# EAGLE board controller 2 (EAGLE 6.2)
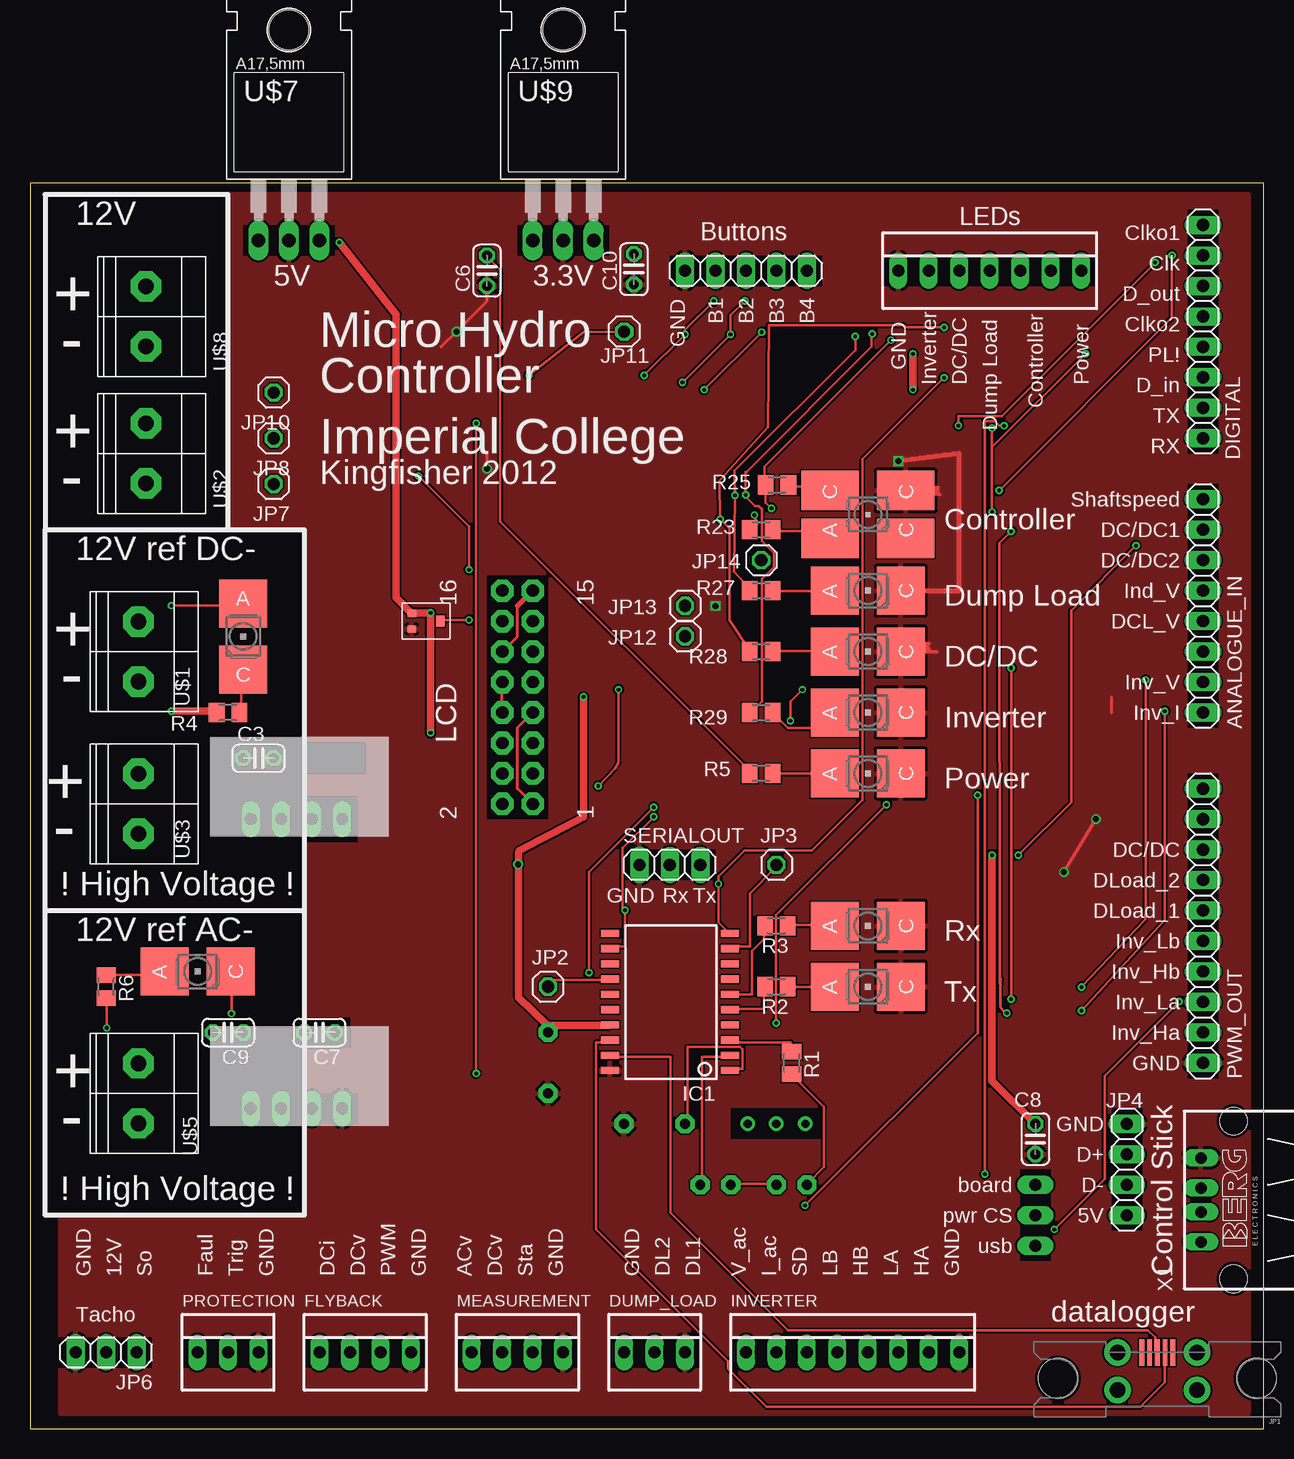
[diagram p0: board, top side]
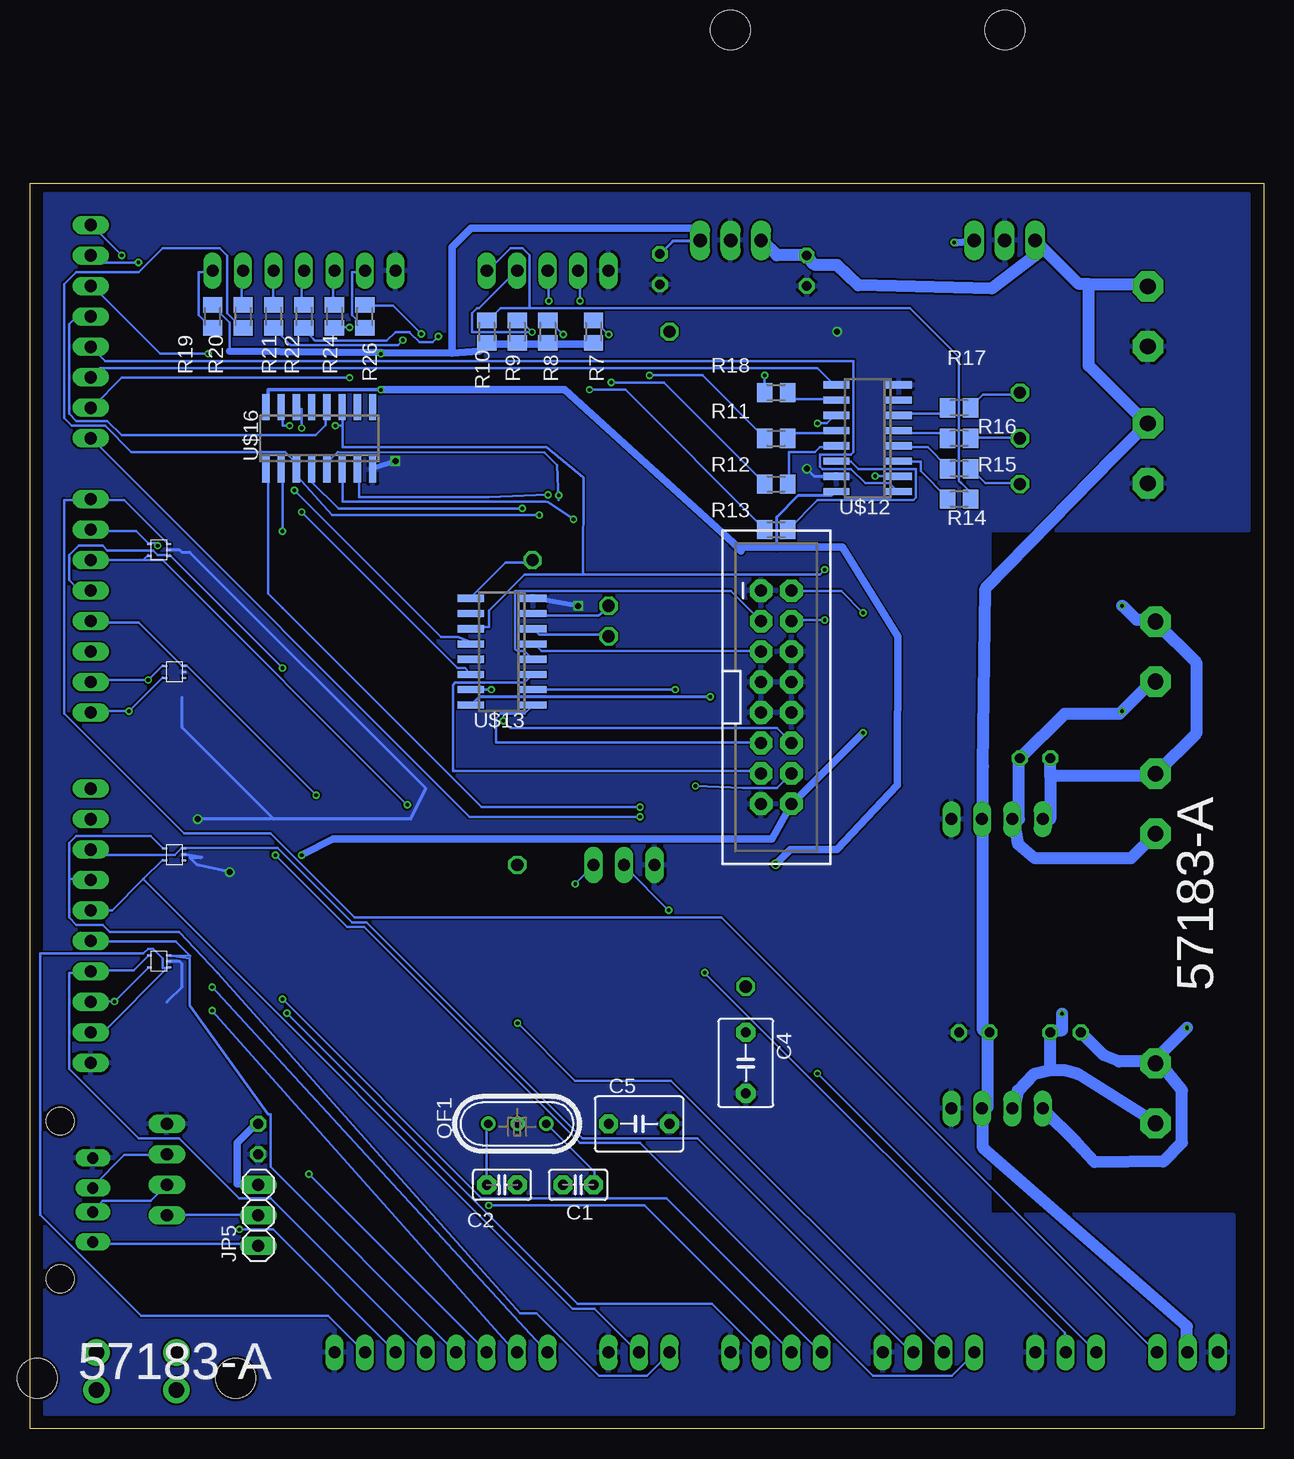
[diagram p1: board, bottom side, seen from below]

Size 102.85 x 103.81 mm. Coordinates in mm from the lower left corner, seen from the top.
Outline: 0,0 102.85,0 102.85,103.81 0,103.81 0,0
Copper layers (1*16): Top 0.035mm / dielectric 1.5mm / Bottom 0.035mm
Design rules: minimum track width 8mil, minimum drill 12mil, track to track 6mil, track to pad 6mil, pad to pad 6mil, via to via 6mil, smd to smd 0mil, copper to edge 10mil, drill to drill 10mil, minimum pad ring 10mil, minimum via ring 6mil, stop-mask expansion 2mil, vias tented up to drill 100mil, thermal gap 10mil
Net classes: 1 Power: width 0.635 mm
tRestrict: area 96.5,81.3 to 99.1,101.6; area 96.5,81.3 to 99.1,101.6; area 96.5,58.4 to 99.1,78.7; area 96.5,29.2 to 99.1,54.6; area 90.2,16.5 to 92.7,26.7; area 82.5,14 to 85.1,21.6; area 58.4,24.1 to 66,26.7; area 58.4,5.1 to 78.7,7.6; area 48.3,5.1 to 55.9,7.6; area 35.6,5.1 to 45.7,7.6; area 22.9,5.1 to 33,7.6; area 12.7,5.1 to 20.3,7.6; 18 more areas

## Footprints (pad centres in the part's own frame; a part is rotated, then mirrored left to right if it is on the bottom)
1X08 = drill 1.016 long: 1 -8.89,0; 2 -6.35,0; 3 -3.81,0; 4 -1.27,0; 5 1.27,0; 6 3.81,0; 7 6.35,0; 8 8.89,0
C2.5-2 = drill 0.813 pad 1.6 octagon: 1 -1.27,0; 2 1.27,0
C025-024X044 = drill 0.813 octagon: 1 -1.27,0; 2 1.27,0
C5B4.5 = drill 0.813 pad 1.6 octagon: 1 -2.54,0; 2 2.54,0
P-LCC-4 = smd 3.3 x 4.8: A -2,3.15; C@1 -2,-3.15; C@3 2,3.15; C@4 2,-3.15
P-LCC-2 = smd 4 x 4: A 0,2.75; C 0,-2.75
22-23-2031 = drill 1 long: 1 -2.54,0; 2 0,0; 3 2.54,0
22-23-2041 = drill 1 long: 1 -3.81,0; 2 -1.27,0; 3 1.27,0; 4 3.81,0
SOIC20 = smd 0.6 x 1.5: 1 -5.715,-5; 2 -4.445,-5; 3 -3.175,-5; 4 -1.905,-5; 5 -0.635,-5; 6 0.635,-5; 7 1.905,-5; 8 3.175,-5; 9 4.445,-5; 10 5.715,-5; 11 5.715,5; 12 4.445,5; 13 3.175,5; 14 1.905,5; 15 0.635,5; 16 -0.635,5; 17 -1.905,5; 18 -3.175,5; 19 -4.445,5; 20 -5.715,5
22-23-2081 = drill 1 long: 1 -8.89,0; 2 -6.35,0; 3 -3.81,0; 4 -1.27,0; 5 1.27,0; 6 3.81,0; 7 6.35,0; 8 8.89,0
MICRO-B-SMT = smd 0.4 x 2.2: 1 -1.3,0; 2 -0.65,0; 3 0,0; 4 0.65,0; 5 1.3,0 | drill 1.3 pad 2.2: P$6 -3.325,3.15; P$7 -3.325,0; P$8 3.325,3.15; P$9 3.325,0 | hole 3.3: -8.275,2.17; 8.275,2.17
1X01 = drill 1.016 octagon: 1 0,0
1X04 = drill 1.016 long: 1 -3.81,0; 2 -1.27,0; 3 1.27,0; 4 3.81,0
1X03 = drill 1.016 long: 1 -2.54,0; 2 0,0; 3 2.54,0
1X05 = drill 1.016 long: 1 -5.08,0; 2 -2.54,0; 3 0,0; 4 2.54,0; 5 5.08,0
2X8-SHROUDED_LOCK = drill 1.016 pad 1.88 octagon: 1 -1.27,8.89; 2 1.27,8.89; 3 -1.27,6.35; 4 1.27,6.35; 5 -1.27,3.81; 6 1.27,3.81; 7 -1.27,1.27; 8 1.27,1.27; 9 -1.27,-1.27; 10 1.27,-1.27; 11 -1.27,-3.81; 12 1.27,-3.81; 13 -1.27,-6.35; 14 1.27,-6.35; 15 -1.27,-8.89; 16 1.27,-8.89
1X10 = drill 1.016 long: 1 -11.43,0; 2 -8.89,0; 3 -6.35,0; 4 -3.81,0; 5 -1.27,0; 6 1.27,0; 7 3.81,0; 8 6.35,0; 9 8.89,0; 10 11.43,0
HC49U = drill 0.7 pad 1.2: 1 -2.413,0; 2 -0.027,0; 3 2.413,0
M0805 = smd 1.3 x 1.6: 1 -0.95,0; 2 0.95,0
CTB1500-2 = drill 1.3 pad 2.54 octagon: P$1 -2.5,0.5; P$2 2.5,0.5
KFP_DC-DC = drill 1 pad 1.016 long: +VIN 2.54,0; +VOUT 7.62,0; -VIN 0,0; -VOUT 5.08,0
TO220 = drill 1.118 long: 1 -2.54,-6.35; 2 0,-6.35; 3 2.54,-6.35 | hole 3.302: 0,11.176
EVS_NXP = smd 0.17 x 0.4: P$1 0.35,-0.15; P$2 0.85,-0.15; P$3 1.35,-0.15; P$4 1.35,1.45; P$5 0.35,1.45
SO16 = smd 0.6 x 2.2: 1 -4.445,-2.6; 2 -3.175,-2.6; 3 -1.905,-2.6; 4 -0.635,-2.6; 5 0.635,-2.6; 6 1.905,-2.6; 7 3.175,-2.6; 8 4.445,-2.6; 9 4.445,2.6; 10 3.175,2.6; 11 1.905,2.6; 12 0.635,2.6; 13 -0.635,2.6; 14 -1.905,2.6; 15 -3.175,2.6; 16 -4.445,2.6
MURATA_PVZ2A = smd 0.6 x 0.7: 1 -0.65,-1.2; 3 0.65,-1.2 | smd 0.9 x 0.7: 2 0,1.2
PN87520 = drill 0.95 long: 1 -3.5,2.71; 2 -1,2.71; 3 1,2.71; 4 3.5,2.71 | hole 2.3: -6.57,0; 6.57,0
22-23-2071 = drill 1 long: 1 -7.62,0; 2 -5.08,0; 3 -2.54,0; 4 0,0; 5 2.54,0; 6 5.08,0; 7 7.62,0

## Placement (x,y rotation side)
ANALOGUE_IN  [1X08]  97.79,68.58 90 top
C1  39p  [C2.5-2]  57.15,20.32 0 bottom
C2  39p  [C2.5-2]  63.5,20.32 180 bottom
C3  10u  [C025-024X044]  19.05,55.88 0 top
C4  0.1u  [C5B4.5]  43.18,30.48 270 bottom
C5  0.1u  [C5B4.5]  52.07,25.4 0 bottom
C6  20u  [C025-024X044]  38.1,96.52 90 top
C7  0.33u  [C025-024X044]  24.13,33.02 180 top
C8  0.1u  [C025-024X044]  83.82,24.13 270 top
C9  10u  [C025-024X044]  16.51,33.02 180 top
C10  0.1u  [C025-024X044]  50.34,96.65 90 top
CONTR_GREEN  [P-LCC-4]  69.85,76.2 90 top
DC/DC  [P-LCC-2]  69.85,64.77 90 top
DC/DC_ON1  [P-LCC-2]  17.78,66.04 0 top
DC/DC_ON2  [P-LCC-2]  69.85,36.83 90 top
DC/DC_ON3  [P-LCC-2]  69.85,41.91 90 top
DC/DC_ON4  [P-LCC-2]  13.97,38.1 90 top
DIGITAL  [1X08]  97.79,91.44 270 top
DUMP_LOAD  22-23-2031  [22-23-2031]  52.07,6.35 0 top
DUMP_LOAD_  [P-LCC-2]  69.85,69.85 90 top
FLYBACK  22-23-2041  [22-23-2041]  27.94,6.35 0 top
IC1  MCP2200SOIC20  [SOIC20]  53.34,35.56 90 top
INVERTER  22-23-2081  [22-23-2081]  68.58,6.35 0 top
INVERTER_  [P-LCC-2]  69.85,59.69 90 top
JP1  USB_MICROB_PLUG-SMT  [MICRO-B-SMT]  93.98,6.35 180 top
JP2  [1X01]  43.18,36.83 0 top
JP3  [1X01]  62.23,46.99 0 top
JP4  [1X04]  91.44,21.59 90 top
JP5  [1X03]  83.82,17.78 90 bottom
JP6  [1X03]  6.35,6.35 180 top
JP7  [1X01]  20.32,78.74 180 top
JP8  [1X01]  20.32,82.55 180 top
JP9  [1X05]  59.69,96.52 180 top
JP10  [1X01]  20.32,86.36 180 top
JP11  [1X01]  49.53,91.44 270 top
JP12  [1X01]  54.61,66.04 0 top
JP13  [1X01]  54.61,68.58 0 top
JP14  [1X01]  60.96,72.39 0 top
LCD_SCREEN  M08X2-SHROUDED_LOCK  [2X8-SHROUDED_LOCK]  40.64,60.96 0 bottom
LED1  [P-LCC-2]  69.85,54.61 90 top
MEASUREMENT  22-23-2041  [22-23-2041]  40.64,6.35 0 top
PROTECTION  22-23-2031  [22-23-2031]  16.51,6.35 0 top
PWM_OUT  [1X10]  97.79,41.91 90 top
QF1  10M7AHC49T  [HC49U]  62.23,25.4 180 bottom
R1  0  [M0805]  63.5,30.48 270 top
R2  200  [M0805]  62.23,36.83 180 top
R3  200  [M0805]  62.23,41.91 180 top
R4  1.2k  [M0805]  16.51,59.69 0 top
R5  1.2k  [M0805]  60.96,54.61 0 top
R6  1.2k  [M0805]  6.35,36.83 270 top
R7  100k  [M0805]  55.88,91.44 90 bottom
R8  100k  [M0805]  59.69,91.44 90 bottom
R9  100k  [M0805]  62.23,91.44 90 bottom
R10  100k  [M0805]  64.77,91.44 90 bottom
R11  20  [M0805]  40.64,82.55 180 bottom
R12  20  [M0805]  40.64,78.74 180 bottom
R13  20  [M0805]  40.64,74.93 180 bottom
R14  20  [M0805]  25.4,77.47 0 bottom
R15  20  [M0805]  25.4,80.01 0 bottom
R16  20  [M0805]  25.4,82.55 0 bottom
R17  20  [M0805]  25.4,85.09 0 bottom
R18  20  [M0805]  40.64,86.36 180 bottom
R19  200  [M0805]  87.63,92.71 270 bottom
R20  200  [M0805]  85.09,92.71 90 bottom
R21  200  [M0805]  82.55,92.71 90 bottom
R22  200  [M0805]  80.01,92.71 90 bottom
R23  200  [M0805]  60.96,74.93 180 top
R24  200  [M0805]  77.47,92.71 90 bottom
R25  200  [M0805]  62.28,78.66 180 top
R26  200  [M0805]  74.93,92.71 270 bottom
R27  200  [M0805]  60.96,69.85 180 top
R28  200  [M0805]  60.96,64.77 180 top
R29  200  [M0805]  60.96,59.69 180 top
SERIALOUT  [1X03]  53.34,46.99 180 top
U$1  CTB1500/2  [CTB1500-2]  9.53,64.77 90 top
U$2  CTB1500/2  [CTB1500-2]  10.16,81.28 90 top
U$3  CTB1500/2  [CTB1500-2]  9.53,52.07 90 top
U$4  KFP_DC-DC12V  [KFP_DC-DC]  26.04,50.8 180 top
U$5  CTB1500/2  [CTB1500-2]  9.53,27.94 90 top
U$6  KFP_DC-DC12V  [KFP_DC-DC]  26.04,26.67 180 top
U$7  KFP_VOLTAGE_REGULATOR  [TO220]  21.59,105.41 0 top
U$8  CTB1500/2  [CTB1500-2]  10.16,92.71 90 top
U$9  KFP_VOLTAGE_REGULATOR  [TO220]  44.45,105.41 0 top
U$10  EVS_NXP  [EVS_NXP]  91.44,38.1 90 bottom
U$11  EVS_NXP  [EVS_NXP]  90.17,46.99 90 bottom
U$12  74HC165  [SO16]  33.02,82.55 90 bottom
U$13  SN74AHC594  [SO16]  63.5,64.77 90 bottom
U$14  EVS_NXP  [EVS_NXP]  90.17,62.23 90 bottom
U$15  EVS_NXP  [EVS_NXP]  91.44,72.39 90 bottom
U$16  SN74AHC594  [SO16]  78.74,82.55 0 bottom
U$17  10k  [MURATA_PVZ2A]  33.02,67.31 270 top
X1  [PN87520]  100.33,19.05 90 top
X2  22-23-2071  [22-23-2071]  80.01,96.52 0 top

## Library data of the parts
ANALOGUE_IN DIGITAL JP2-JP14 PWM_OUT SERIALOUT = pinhead
C1 C2 C4 C5 = capacitor-wima
C3 C6-C10 = rcl
CONTR_GREEN DC/DC DC/DC_ON1-DC/DC_ON4 DUMP_LOAD_ INVERTER_ LED1 = led
DUMP_LOAD PROTECTION = con-molex; MF: MOLEX; MPN: 22-23-2031; OC_FARNELL: 1462950; OC_NEWARK: 30C0862
FLYBACK MEASUREMENT = con-molex; MF: MOLEX; MPN: 22-23-2041; OC_FARNELL: 1462920; OC_NEWARK: 38C0355
IC1 = microchip-update-2
INVERTER = con-molex; MF: MOLEX; MPN: 22-23-2081; OC_FARNELL: 1756826; OC_NEWARK: 01C7592
JP1 LCD_SCREEN = SparkFun
QF1 = crystal; OC_FARNELL: unknown; OC_NEWARK: unknown
R1-R29 = resistor
U$1-U$3 U$5 U$8 U$17 = eko-parts
U$4 U$6 = dc-dc12V
U$7 U$9 = transistor-fet_edited
U$10-U$16 = lbr_controller
X1 = con-berg; OC_FARNELL: unknown; OC_NEWARK: unknown
X2 = con-molex; MF: MOLEX; MPN: 22-23-2071; OC_FARNELL: 1654534; OC_NEWARK: 56H0445

## Nets
3.3V: C4.1 C10.2 IC1.17 R7.1 R8.1 R9.1 R10.1 R19.1 U$9.3 U$12.16 U$13.16 U$16.16
5V: C8.1 JP5.3 LCD_SCREEN.2 LCD_SCREEN.16 U$7.3 U$17.1
12V: C6.2 C7.2 JP6.2 R5.1 U$2.P$2 U$4.+VIN U$6.+VIN U$7.1 U$8.P$2 U$9.1
CLOCK: DIGITAL.2 U$12.2 U$13.11 U$16.11
CTR_PICCOLO_POWER: JP4.1 JP5.2
D1: LCD_SCREEN.12 U$13.15
D2: LCD_SCREEN.11 U$13.1
D3: LCD_SCREEN.14 U$13.2
D4: LCD_SCREEN.13 U$13.3
DATA_IN: DIGITAL.6 U$12.9
DC/DC_IN_1: ANALOGUE_IN.6 FLYBACK.2 U$15.P$5
DC/DC_IN_2: ANALOGUE_IN.7 FLYBACK.1 U$15.P$4
DC/DC_ON: R26.1 R29.2 U$16.7
DUMP_LOAD1: DUMP_LOAD.2 PWM_OUT.6 U$11.P$5
DUMP_LOAD2: DUMP_LOAD.1 PWM_OUT.7 U$11.P$4
DUMP_LOAD_1_ON: R22.1 R27.2 U$16.5
E: LCD_SCREEN.5 U$13.5
FLYBACK: FLYBACK.3 PWM_OUT.8 U$11.P$3
GND: C4.2 C5.2 C6.1 C7.1 C8.2 C10.1 CONTR_GREEN.C@4 DC/DC.C DC/DC_ON2.C DC/DC_ON3.C DUMP_LOAD.3 DUMP_LOAD_.C FLYBACK.4 IC1.20 INVERTER.8 INVERTER_.C JP4.4 JP6.3 JP9.5 LCD_SCREEN.1 LCD_SCREEN.6 LCD_SCREEN.7 LCD_SCREEN.8 LCD_SCREEN.9 LCD_SCREEN.10 LCD_SCREEN.15 LED1.C MEASUREMENT.4 PROTECTION.3 PWM_OUT.1 SERIALOUT.3 U$2.P$1 U$4.-VIN U$6.-VIN U$7.2 U$8.P$1 U$9.2 U$10.P$2 U$11.P$2 U$12.8 U$12.15 U$13.8 U$14.P$2 U$15.P$2 U$16.8 U$17.3 X1.4 X2.1
GND#: JP1.5
INV_HA: INVERTER.7 PWM_OUT.2 U$10.P$1
INV_HB: INVERTER.5 PWM_OUT.4 U$10.P$4
INV_I: ANALOGUE_IN.1 INVERTER.2 U$14.P$5
INV_LA: INVERTER.6 PWM_OUT.3 U$10.P$5
INV_LB: INVERTER.4 PWM_OUT.5 U$10.P$3
INV_V: ANALOGUE_IN.2 INVERTER.1 U$14.P$4
INVERTER_ON: R24.1 R28.2 U$16.6
LOAD: DIGITAL.5 U$12.1
MEAS_AC: ANALOGUE_IN.5 MEASUREMENT.1 U$15.P$1
MEAS_DC: ANALOGUE_IN.4 MEASUREMENT.2 U$14.P$3
N$1: R12.1 U$12.13
N$2: LED1.A R5.2
N$4: R19.2 X2.7
N$5: R16.1 U$12.5
N$7: DC/DC_ON1.C R4.2
N$8: R17.1 U$12.6
N$9: JP12.1 U$13.6
N$10: IC1.3 R1.1
N$11: DIGITAL.1 U$13.12
N$12: JP13.1 U$13.7
N$13: R20.1 R23.2 U$16.3
N$14: C2.2 QF1.3 R1.2
N$15: ANALOGUE_IN.3
N$18: U$11.P$1
N$19: DC/DC_ON4.A R6.1
N$20: JP14.1 U$13.9
N$21: U$14.P$1
N$23: R21.1 R25.2 U$16.4
N$24: DIGITAL.3 U$13.14 U$16.14
N$30: JP9.1 R10.2 R14.2
N$34: JP9.2 R9.2 R13.2
N$35: C3.1 DC/DC_ON1.A U$1.P$2 U$3.P$2 U$4.+VOUT
N$36: C1.1 C2.1
N$37: C1.2 IC1.2 QF1.1
N$38 [Power]: C3.2 R4.1 U$1.P$1 U$3.P$1 U$4.-VOUT
N$39: R20.2 X2.6
N$40: R21.2 X2.5
N$42: R22.2 X2.4
N$44: JP9.3 R8.2 R12.2
N$45: C9.2 R6.2 U$5.P$2 U$6.+VOUT
N$47: U$16.9
N$48: C9.1 DC/DC_ON4.C U$5.P$1 U$6.-VOUT
N$49: DIGITAL.4 U$16.12
N$51: DUMP_LOAD_.A R27.1
N$52: DC/DC.A R28.1
N$53: INVERTER_.A R29.1
N$54: CONTR_GREEN.A R23.1
N$55: JP9.4 R7.2 R11.2
N$56: R24.2 X2.3
N$57: R26.2 X2.2
N$58: R18.1 U$12.10
N$61: R11.1 U$12.12
N$62: R13.1 U$12.14
N$63: R14.1 U$12.3
N$64: R15.1 U$12.4
N$65: JP7.1 R15.2
N$66: JP8.1 R16.2
N$67: JP10.1 R17.2
N$68: JP11.1 R18.2
N$69: DC/DC_ON2.A R2.1
N$70: DC/DC_ON3.A R3.1
N$71: C5.1 IC1.1
N$72: IC1.5 R2.2
N$73: IC1.6 R3.2
N$74: IC1.14 JP2.1
N$75: IC1.9 JP3.1
PROTEC_FAULT: PROTECTION.1 U$12.11
PROTEC_TRIGGER: PROTECTION.2 U$16.1
RS: LCD_SCREEN.3 U$13.4
RX: DIGITAL.8 IC1.12 SERIALOUT.2
SHAFTSPEED_IN: ANALOGUE_IN.8 JP6.1 U$15.P$3
SHUT_DOWN: INVERTER.3 U$16.15
START_UP: MEASUREMENT.3 U$16.2
TX: DIGITAL.7 IC1.10 SERIALOUT.1
USB_D+: JP4.3 X1.3
USB_D-: JP4.2 X1.2
USB_UART_D+: IC1.19 JP1.3
USB_UART_D-: IC1.18 JP1.2
V0: LCD_SCREEN.4 U$17.2
V_USB: JP5.1 X1.1

## Tracks (layer width: path | path; a pad name or v marks a point on that pad's centre or on a via)
3.3V  (via drill 0.3, 0.5)
  Top 0.203: 43.2,33.2 43.2,33.6 C4.1 | 48.2,33.6 IC1.17
  Top 0.61: 48.2,33.6 43.2,33.6 43.15,33.6 40.73,35.95 40.73,47.08 | 43.2,33.2 C4.1 | v46.14,61 46.14,51 40.81,48.17 40.73,48.03 40.73,47.08 | v73.6,86.6 v73.6,89.6 | 40.73,47.08 v40.69,47.03
  Bottom 0.203: 56,90.4 R7.1 | 59.6,90.4 R8.1 59.8,90.4 | 62.4,90.4 R9.1 62.2,90.4 | 64.6,90.4 R10.1 64.8,90.4 | 86.2,89.8 86.2,92.2 87.6,93.6 R19.1 | 47,99 U$9.3 | 36,77.8 35.8,78 U$12.16 | 66,60.4 U$13.16 | 83,85.2 U$16.16 | v73.6,89.6 73.6,89.67
  Bottom 0.254: 36,77.8 38.8,77.8 40.6,76 40.6,73.47 | 66,60.4 65.4,61 v46.14,61 | 43.87,73.47 44.26,73.86 | 47,99 49.26,99 C10.2
  Bottom 0.305: 83,85.2 83,86.6 v73.6,86.6
  Bottom 0.61: 59.6,90.4 56,90.4 | 64.6,90.4 62.4,90.4 | 67.67,89.65 65.4,89.8 64.8,90.4 | 67.67,89.65 73.6,89.67 86.2,89.8 | 62.2,90.4 59.8,90.4 | 47,99 47.2,100.07 66.07,100.07 67.67,98.47 67.67,89.65 | v73.6,86.6 58.27,86.6 44.26,73.86 43.56,73.17 | 43.87,73.47 40.6,73.47 35.13,73.47 30.51,66 30.53,53.64 35.56,48.26 39.46,48.26 v40.69,47.03 40.73,46.99
5V  (via drill 0.3)
  Top 0.203: 32,68 U$17.1 | 83.8,25.4 C8.1
  Top 0.61: 32,68 v33.4,68 v33.4,58 | v25.8,98.87 30.53,92.87 30.53,69.27 U$17.1 | 83.8,25.4 80.2,29 v80.2,47.8
  Bottom 0.203: C8.1 84,25.4 | 84,20.4 JP5.3 | v33.4,68 35.2,69.8 39.2,69.8 LCD_SCREEN.2 | v25.8,98.87 25.6,98.87 | 24.2,99 U$7.3 | 39.2,52.2 LCD_SCREEN.16 39.4,52
  Bottom 0.61: 84,25.4 85.6,23.8 85.6,20.4 84,20.4 | 25.6,98.87 24.2,99 | 39.2,52.2 v33.4,58 | v80.2,47.8 77.6,49.13 41,49.13 39.4,52
12V
  Top 0.203: R5.1 60,54.8 39.2,75.6 39.2,96.6 38.2,97.6 C6.2
  Bottom 0.203: 23,26.8 23.4,26.8 U$6.+VIN 23.4,26.6 | 23,33 C7.2 23,33.2 23.4,33.2 | 19,99 U$7.1 19.2,99 | 9.8,95.4 U$8.P$2 | 9.8,83.8 U$2.P$2 9.8,83.6 | 41.8,99 U$9.1 | 38.2,97.8 C6.2 38,97.6 | 23.4,50.8 U$4.+VIN
  Bottom 1.016: 23,26.8 23,33 | 23.4,33.2 23.4,50.8 23.4,55.2 23.2,70.01 12.4,81.08 9.88,83.6 9.8,83.6 | 23.4,26.6 23.4,23.4 6.4,8.51 6.4,6.35 JP6.2 | 19,99 15.4,95.4 14.6,95.4 | 14.6,95.4 9.8,95.4 | 9.8,83.8 14.6,88.6 14.6,95.4 | 41.8,99 40.6,97.8 38.2,97.8 | 19.2,99 19,97.81 22.67,95.03 33.81,95.3 35.56,97 37.4,97 38,97.6
CLOCK  (via drill 0.3)
  Top 0.203: v32.4,79.4 36.6,75.2 v36.6,71.6 | v93.8,97.2 81,84.4 77.4,84.4 v77.4,83.6
  Bottom 0.203: v32.4,79.4 30.6,79.4 U$12.2 | v36.6,71.6 37,71.2 56.73,71.2 | 56.73,71.2 61.6,71.2 64.6,68.2 64.6,66.8 66,66.8 U$13.11 | 76.8,83.6 76.8,81.8 59.77,81.83 56.72,79.29 56.73,71.2 | 76.8,83.6 76.8,85 U$16.11 | v93.8,97.2 97.2,97.2 DIGITAL.2 | 76.8,83.6 v77.4,83.6
CTR_PICCOLO_POWER
  Bottom 0.203: JP5.2 84,17.8 91.4,17.8 JP4.1
D1  (via drill 0.3)
  Top 0.203: v64.4,61.6 63.4,60.6 v63.4,59
  Bottom 0.203: v64.4,61.6 66,61.6 U$13.15 | v63.4,59 62.8,58.4 40.6,58.4 39.4,57.2 LCD_SCREEN.12
D2
  Bottom 0.203: U$13.1 61,60.2 61.6,59.6 63.6,59.6 64,59.2 64,57.2 42,57.2 LCD_SCREEN.11
D3  (via drill 0.3)
  Top 0.203: v47.38,53.56 48.79,55.04 49.07,55.5 v49.06,61.6
  Bottom 0.203: v49.06,61.6 60.8,61.6 U$13.2 | v47.38,53.56 43.4,53.4 40.6,53.4 39.4,54.6 LCD_SCREEN.14
D4
  Bottom 0.203: U$13.3 61,62.8 61.6,62.2 67.4,62.2 67.6,62 67.6,54.8 42,54.8 LCD_SCREEN.13
DATA_IN
  Bottom 0.203: U$12.9 35.8,87 37.2,88.4 97,88.4 97.6,87.8 DIGITAL.6
DC/DC_IN_1  (via drill 0.3)
  Top 0.203: v62.2,33.8 62.2,42.8 v71.4,52
  Bottom 0.203: 93.4,72.4 93,72.8 U$15.P$5 | 93.4,72.4 97.6,72.4 ANALOGUE_IN.6 | v62.2,33.8 57.4,29 49.4,29 26.8,6.4 FLYBACK.2 | v71.4,52 91.8,72.4 93.4,72.4
DC/DC_IN_2  (via drill 0.3)
  Top 0.203: v82.4,47.8 86.8,52.2 86.8,68.2 v92.2,73.6
  Bottom 0.203: ANALOGUE_IN.7 97.6,74.8 94,74.8 93,73.8 U$15.P$4 92.8,73.8 92.4,73.8 v92.2,73.6 | v82.4,47.8 76.4,41.8 75,41.8 57,23.8 52,23.8 32.6,4.4 26,4.4 24.2,6.2 FLYBACK.1
DC/DC_ON  (via drill 0.3)
  Top 0.203: R29.2 60.2,59.8 61,60.6 61,70.8 62,71.8 62,73 61,74 61,76 61.01,76.01 61.01,76.63 60.73,76.91 60.45,76.91 59.66,77.7 59.66,77.74 | 59.66,77.74 59.66,79.73 59.72,79.73 70.16,90.17 70.16,91.19 v70.21,91.25 | 59.66,77.74 v59.66,77.84
  Bottom 0.203: v59.66,77.84 64.61,77.66 75.41,77.66 75.4,79.2 75.4,79.8 U$16.7 | R26.1 74.8,93.6 72.56,93.6 v70.21,91.25
DUMP_LOAD1
  Bottom 0.203: 93.4,45.8 96,43.2 97.6,43.2 PWM_OUT.6 | 93.4,45.8 91.8,47.4 U$11.P$5 | 93.4,45.8 57.6,10 55.8,10 52.2,6.4 DUMP_LOAD.2
DUMP_LOAD2
  Bottom 0.203: 99.6,45.8 99.6,48.8 99,49.4 92.8,49.4 91.8,48.4 U$11.P$4 | 99.6,45.8 97.8,45.8 PWM_OUT.7 | 99.6,45.8 99.6,42.6 99,42 96.8,42 96.2,41.4 90.4,41.4 87.22,38 62,9.6 60.6,9.6 55.4,4.4 51.4,4.4 49.6,6.2 DUMP_LOAD.1
DUMP_LOAD_1_ON  (via drill 0.3)
  Top 0.203: R27.2 60,70 58.7,71.46 v58.77,77.78 58.75,79.52 58.75,79.85 68.81,89.92 v68.81,91.05 v68.8,91.05
  Bottom 0.203: v58.77,77.78 58.78,77.4 58.9,80.3 59.97,81.37 77.2,81.4 78,80.6 78,80 U$16.5 | R22.1 80,91.6 79.2,90.8 79.2,90.78 79.1,90.68 73.1,90.68 72.36,91.42 71.22,91.42 71.2,91.39 71.2,91.36 70.38,90.55 69.3,90.55 v68.8,91.05
E
  Bottom 0.203: U$13.5 60.8,65.4 60.2,64.8 42,64.8 LCD_SCREEN.5
FLYBACK
  Bottom 0.203: PWM_OUT.8 97.6,48.2 97.2,47.8 90.8,47.8 90.2,48.4 U$11.P$3 90,48.4 82.2,48.4 76,42.2 74.8,42.2 56.8,24.2 47.2,24.2 29.4,6.4 FLYBACK.3
GND  (via drill 0.5)
  Top 0.254: 40.64,68.58 40.64,66.04 LCD_SCREEN.6 | LCD_SCREEN.10 LCD_SCREEN.8 | LCD_SCREEN.9 40.64,58.42 40.64,53.34 LCD_SCREEN.15 | C6.1 38.1,93.98 v35.56,91.44 34.29,90.17 | v38.1,80.01 38.1,81.28 | 90.17,59.69 90.17,60.96 | v88.88,50.8 v86.21,46.38 | DC/DC.C 75.59,64.77 75.64,64.72 75.16,64.72 74.45,65.43 74.45,65.2 74.57,65.08 74.57,65.28 74.65,65.35 74.6,65.41 74.95,65.41 74.98,65.43 74.52,65.43 74.5,65.41 74.62,65.41 74.93,65.1 74.7,65.1 74.6,65 74.8,65 74.88,64.92 74.68,64.92 74.65,64.9 74.95,64.9 75.01,64.95 | CONTR_GREEN.C@4 75.55,78.2 75.89,77.85 75.23,77.85 75.16,77.93 75.34,77.93 | 75.34,77.93 75.51,77.93 | 75.34,77.93 75.23,78.03 | 75.23,78.03 75.16,78.03 | 75.23,78.03 75.64,78.03 75.67,78 75.26,78 75.11,78.16 75.67,78.16 75.72,78.21 75.18,78.21 75.11,78.28 75.36,78.28 75.49,78.41 75.34,78.41 75.31,78.44 | 75.31,78.44 75.72,78.44 | 75.72,78.44 75.74,78.44 | 75.31,78.44 75.26,78.44 75.21,78.49 75.67,78.49 75.72,78.44
  Top 0.406: DUMP_LOAD_.C 77.47,69.85 77.47,81.28 v72.39,80.64 | 40.64,68.58 LCD_SCREEN.1
  Bottom 0.254: U$12.15 37.47,79.38 v38.1,80.01 | U$15.P$2 90.39,73.24 90.17,73.03 89.53,73.03 69.85,53.34 71.12,50.8 82.55,50.8 | 82.55,50.8 90.17,58.42 90.17,60.96 | U$10.P$2 90.39,38.95 90.17,38.73 90.17,36.83 91.44,35.56 | 82.55,50.8 v88.88,50.8 | v86.21,46.38 88.9,46.99 89.53,47.62 88.53,47.62 U$11.P$2
  Bottom 0.406: v72.39,80.64 74.3,80.01 U$16.8 | v57.15,68.58 U$13.8
  pour Bottom: 1.27,102.87 101.6,102.87 101.6,1.27 2.54,1.27 2.54,17.78 22.86,17.78 22.86,74.93 1.27,74.93
  pour Top: 16.51,102.87 16.51,74.93 22.86,74.93 22.86,17.78 2.54,17.78 2.54,1.27 101.6,1.27 101.6,102.87
INV_HA
  Bottom 0.203: 91.4,38.4 96.6,33.2 97.6,33.2 PWM_OUT.2 | 91.4,38.4 91.8,38.4 91.8,39.2 92.6,40 93,40 93.4,39.6 102,39.6 102,17.8 93.6,9.4 78,9.4 75,6.4 INVERTER.7 | 91.4,38.4 U$10.P$1
INV_HB
  Bottom 0.203: U$10.P$4 93,39.4 94.2,38.2 97.6,38.2 PWM_OUT.4 97.8,38 99.6,38 99.6,30 93.8,24.2 90.4,24.2 85.4,19.2 82.8,19.2 70,6.4 INVERTER.5
INV_I  (via drill 0.3)
  Top 0.203: v87.66,34.84 94.6,42.41 v94.6,59.8
  Bottom 0.203: U$14.P$5 91.8,62.6 v94.6,59.8 97.6,59.8 ANALOGUE_IN.1 | v87.66,34.84 62.4,6.4 INVERTER.2
INV_LA  (via drill 0.3)
  Top 0.203: v85.4,16.6 89.6,20.8 89.6,29.4 v95.8,35.6
  Bottom 0.203: U$10.P$5 93,38.4 v95.8,35.6 97.6,35.6 PWM_OUT.3 | v85.4,16.6 82.6,16.6 72.4,6.4 INVERTER.6
INV_LB
  Bottom 0.203: PWM_OUT.5 97.6,40.6 90.69,40.6 89.5,39.4 U$10.P$3 91.2,39.4 91,39.4 89.53,39.2 89.53,35.27 83,26.2 82.8,26.2 82.8,21.8 67.4,6.4 INVERTER.4
INV_V  (via drill 0.3)
  Top 0.203: v87.66,36.8 92.97,42.46 93,43.46 v93,62.4
  Bottom 0.203: U$14.P$4 91.8,63.6 v93,62.4 97.6,62.4 ANALOGUE_IN.2 | v87.66,36.8 59.8,6.4 INVERTER.1
INVERTER_ON  (via drill 0.3)
  Top 0.203: R28.2 60,64.8 58.3,67.42 58.29,67.42 58.29,75.03 v57.54,75.8 57.46,79.04 61.52,83.48 61.6,92 72.8,92 73,91.8 v76.2,91.8
  Bottom 0.203: v57.54,75.8 59.66,77.22 59.89,77.29 76.8,77.26 76.8,79.4 76.8,79.8 U$16.6 | v76.2,91.8 77.4,91.8 R24.1
LOAD
  Bottom 0.203: U$12.1 30.6,78.2 31.2,78.8 33.2,78.8 34.4,80 36.8,80 37,80.2 37,81.2 34.4,81.2 34.2,81.4 34.2,89 96.6,89 97.6,90 DIGITAL.5
MEAS_AC  (via drill 0.3)
  Top 0.203: v81.8,35.8 v81.8,63.4
  Bottom 0.203: ANALOGUE_IN.5 97.8,70 98.85,70 99.6,70.75 99.6,72.8 98.8,73.6 96.8,73.6 96.4,73.2 92.6,73.2 92.2,72.8 91.4,72.8 U$15.P$1 91.2,72.8 v81.8,63.4 | v81.8,35.8 65.2,19.2 49.8,19.2 37,6.4 MEASUREMENT.1
MEAS_DC  (via drill 0.3)
  Top 0.203: v64.6,18.6 79,33 v79,52.8
  Bottom 0.203: ANALOGUE_IN.4 97.6,67.2 93.8,67.2 90.2,63.6 U$14.P$3 90,63.6 89.8,63.6 v79,52.8 | v64.6,18.6 51.6,18.6 39.4,6.4 MEASUREMENT.2
N$1
  Bottom 0.203: R12.1 39.6,78.8 39.6,81.4 37.4,81.4 37,81.8 35.8,81.8 U$12.13
N$2
  Top 0.203: R5.2 62,54.6 67,54.6 LED1.A
N$4
  Bottom 0.203: R19.2 87.8,91.8 88.8,92.8 88.8,96.4 87.8,96.4 X2.7
N$5
  Bottom 0.203: R16.1 26.8,83 30.4,83 U$12.5
N$6
  Top 0.203: 63.58,78.54 65.02,78.54 65.02,78.56
N$7
  Top 0.203: R4.2 17.6,59.8 17.6,63.2 DC/DC_ON1.C
N$8
  Bottom 0.203: R17.1 26.4,85 26.8,84.6 30.4,84.6 U$12.6
N$9
  Bottom 0.203: U$13.6 60.8,66.6 60.4,66.2 54.8,66.2 JP12.1
N$10
  Top 0.203: IC1.3 58.4,32.2 63.4,32.2 63.4,31.6 R1.1
N$11  (via drill 0.3)
  Top 0.203: v80.8,78.2 95.2,92.6 v95.2,97.8
  Bottom 0.203: v80.8,78.2 68.6,66 67.17,66 66.2,65.6 U$13.12 | v95.2,97.8 97.6,100.2 DIGITAL.1
N$12
  Bottom 0.203: U$13.7 60.8,68 60.4,67.77 55.46,67.77 54.65,68.41 JP13.1
N$13  (via drill 0.3)
  Top 0.203: v60.4,76.15 60.6,75.4 60.2,75 R23.2
  Bottom 0.203: v60.4,76.15 60.84,76.16 77.66,76.16 80.6,79.4 80.6,79.8 U$16.3 80.8,80 80.8,80.6 81.6,81.4 94.4,81.4 96.6,83.6 99.38,83.6 100,84.22 100,95.4 99,96.4 93.8,96.4 91.8,98.4 87.04,98.4 86.4,97.76 86.4,93 85.2,91.8 R20.1
N$14
  Top 0.203: R1.2 63.6,29.4 66.2,26.8 66.2,21.8 64.8,20.4 C2.2
  Bottom 0.203: QF1.3 64.8,25.4 64.8,20.4 C2.2
N$19
  Top 0.203: R6.1 6.4,37.8 11.2,37.8 11.2,38 DC/DC_ON4.A
N$20
  Bottom 0.203: U$13.9 66,69.4 63.2,72.2 61,72.2 JP14.1
N$23  (via drill 0.3)
  Top 0.203: v61.82,76.71 61.33,77.2 R25.2 61.21,78.78 61.21,80.18 v71.77,90.73
  Bottom 0.203: 79.2,79.2 79.2,79.8 U$16.4 79.38,78.92 77.14,76.68 61.85,76.68 v61.82,76.71 | R21.1 82.4,91.6 81.2,90.4 81.2,90.39 81.13,90.32 72.17,90.32 v71.77,90.73
N$24  (via drill 0.3)
  Top 0.203: 80.2,81.8 v80.2,83.4 | v80.2,76.4 80.2,81.8 | 80.2,81.8 v88,89.6
  Bottom 0.203: v80.2,76.4 67.2,63.4 66.6,63.4 66.2,63 U$13.14 | v80.2,83.4 80.2,85 80.6,85 U$16.14 | v88,89.6 92,89.6 97.6,95.2 DIGITAL.3
N$30
  Bottom 0.203: 61.2,93.4 63.6,93.4 64.6,92.4 R10.2 | 61.2,93.4 29.5,93.4 25.4,89.3 25.4,79 25.2,78.8 24.6,78.2 24.6,77.6 R14.2 | 61.2,93.4 61.2,97.8 61.8,98.4 62.8,98.4 64.6,96.6 JP9.1
N$34  (via drill 0.3)
  Top 0.203: v56.2,86.6 v61,91.4
  Bottom 0.203: v56.2,86.6 53.2,86.6 41.6,75 R13.2 | R9.2 62.2,92.2 61.8,92.2 v61,91.4 66,91.4 66,93 65.6,93.4 65.4,93.4 62.4,96.4 JP9.2
N$35  (via drill 0.3)
  Top 0.203: v11.8,68.6 17.6,68.6 DC/DC_ON1.A
  Bottom 0.203: 9.2,67.4 U$1.P$2 9,67.2 | 17.8,55.8 C3.1 | 9.2,54.4 U$3.P$2 9,54.6
  Bottom 1.016: v11.8,68.6 10.6,67.4 9.2,67.4 | 17.8,54.4 17.8,50.8 U$4.+VOUT | 17.8,54.4 17.8,55.8 | 9.2,54.4 17.8,54.4 | 9,67.2 5.6,63.8 5.6,58 9,54.6
N$36
  Top 0.203: C1.1 58.6,20.4 62.2,20.4 C2.1
N$37
  Top 0.203: IC1.2 58.2,31 56,31 56,20.4 C1.2
  Bottom 0.203: QF1.1 59.8,25.4 55.8,21.4 55.8,20.4 C1.2
N$38  (via drill 0.3)
  Top 0.635: v11.8,59.8 15.4,59.8 R4.1
  Bottom 0.635: 20.4,55.8 C3.2 | 20.4,50.8 U$4.-VOUT 20.8,50.6 | 9.4,62.2 9.2,62.2 | 12,59.6 v11.8,59.8 | U$3.P$1 9.2,49.4
  Bottom 1.016: 20.4,50.8 20.4,55.8 | v11.8,59.8 9.4,62.2 | 9.2,62.2 U$1.P$1 | 12,59.6 16.6,59.6 C3.2 | 9.2,49.4 11.07,47.53 19.07,47.53 20.47,48.71 20.8,50.6
N$39
  Bottom 0.203: R20.2 85.2,93.8 85.2,96.4 X2.6
N$40
  Bottom 0.203: R21.2 82.6,93.8 82.6,96.4 X2.5
N$42
  Bottom 0.203: R22.2 80.2,93.8 80.2,96.4 X2.4
N$44  (via drill 0.3)
  Top 0.203: v54.4,87.2 v58.4,91.2 58.4,92.8 v59.6,94
  Bottom 0.203: v54.4,87.2 50,87.2 41.6,78.8 R12.2 | v58.4,91.2 59.4,92.2 59.6,92.2 R8.2 | v59.6,94 59.6,96.4 JP9.3
N$45  (via drill 0.3)
  Top 0.203: v6.4,33.4 6.4,35.8 R6.2
  Bottom 0.203: 15.2,33 C9.2 | 9.2,30.6 U$5.P$2 9,30.4 | 18.4,26.6 U$6.+VOUT
  Bottom 1.016: v6.4,33.4 9.2,30.6 12.06,30.6 13.32,31.12 15.2,33 | 18.4,26.6 15.6,23.8 14.09,22.2 8.38,22.27 6.82,23.85 6.82,28.17 8.61,30.4 9,30.4
N$48  (via drill 0.3)
  Top 0.203: v16.8,34.6 16.8,38 DC/DC_ON4.C
  Bottom 0.203: 17.8,33 C9.1 17.6,33.2 | 20.8,26.8 U$6.-VOUT | U$5.P$1 9.2,25.6
  Bottom 1.016: 17.8,29.87 17.8,33 | 17.8,29.87 19.21,29.51 20.5,28.16 20.8,26.8 | v16.8,34.6 16.8,33.2 17.6,33.2 | 9.2,25.6 15.5,29.55 16.61,29.87 17.8,29.87
N$49
  Bottom 0.203: U$16.12 78.2,85 78.2,83.65 79.05,82.8 95.2,82.8 96.4,84 99,84 99.6,84.6 99.6,92.04 99.04,92.6 97.8,92.6 DIGITAL.4
N$51
  Top 0.203: R27.1 62,69.8 67,69.8 DUMP_LOAD_.A
N$52
  Top 0.203: R28.1 62,64.8 67,64.8 DC/DC.A
N$53
  Top 0.203: R29.1 63.2,58.4 67,58.4 67,59.6 INVERTER_.A
N$54
  Top 0.203: R23.1 62,74.8 66.6,74.8 66.6,74.2 CONTR_GREEN.A
N$55  (via drill 0.3)
  Top 0.203: v51.2,87.8 v54.6,91.2 54.6,91.6 v57,94
  Bottom 0.203: v51.2,87.8 46.8,87.8 41.6,82.6 R11.2 | v54.6,91.2 55.6,92.2 55.8,92.2 R7.2 | v57,94 57,96.4 JP9.4
N$56
  Bottom 0.203: R24.2 77.6,93.8 77.6,96.4 X2.3
N$57
  Bottom 0.203: R26.2 75,91.8 76,92.8 76,96.4 75,96.4 X2.2
N$58
  Bottom 0.203: R18.1 39.6,86.2 39.2,85.8 35.8,85.8 U$12.10
N$61
  Bottom 0.203: R11.1 39.6,82.6 39.2,83 35.8,83 U$12.12
N$62
  Bottom 0.203: R13.1 39.6,75 37.2,77.4 29.2,77.4 29,77.6 29,80 33.8,80 34.4,80.6 35.6,80.6 U$12.14
N$63
  Bottom 0.203: R14.1 26.4,77.6 28.6,79.8 28.6,80.6 30.4,80.6 U$12.3
N$64
  Bottom 0.203: R15.1 26.4,80.2 28,81.8 30.4,81.8 U$12.4
N$65
  Bottom 0.203: R15.2 24.4,80 23.2,78.8 20.4,78.8 JP7.1
N$66
  Bottom 0.203: R16.2 24.4,82.6 20.4,82.6 JP8.1
N$67
  Bottom 0.203: R17.2 24.4,85.2 23.4,86.2 20.4,86.2 JP10.1
N$68  (via drill 0.3)
  Top 0.203: v41.6,87.8 41.8,88 46.13,91.38 JP11.1
  Bottom 0.203: v41.6,87.8 41.6,86.4 R18.2
N$69
  Top 0.203: R2.1 63.2,36.8 67,36.8 DC/DC_ON2.A
N$70
  Top 0.203: R3.1 63.2,42 67,42 DC/DC_ON3.A
N$71
  Top 0.203: IC1.1 58.4,30 59.4,30 59.4,31.6 59.2,31.8 54.8,31.8 54.8,25.4 C5.1
N$72
  Top 0.203: IC1.5 58.4,35 61.2,35 61.2,36.8 R2.2
N$73
  Top 0.203: IC1.6 58.4,36.2 60.2,36.2 60.2,39.8 61.2,40.8 61.2,41.8 R3.2
N$74
  Top 0.203: IC1.14 48.2,37.4 43.2,37.4 43.2,37 JP2.1
N$75
  Top 0.203: IC1.9 58.4,40.2 60,40.2 60,44.6 62.2,46.8 JP3.1
PROTEC_FAULT  (via drill 0.3)
  Top 0.203: v37.2,29.6 v37.2,83.8
  Bottom 0.203: v37.2,83.8 36.4,83.8 35.8,84.4 U$12.11 | v37.2,29.6 14,6.4 PROTECTION.1
PROTEC_TRIGGER  (via drill 0.3)
  Top 0.203: v52,51.8 46.6,46.4 v46.6,38
  Bottom 0.203: v52,51.8 65.2,51.8 81.8,68.4 83,69.6 83,79.8 U$16.1 | v46.6,38 16.6,8 16.6,6.4 PROTECTION.2
RS
  Bottom 0.203: U$13.4 61,64.2 61.6,64.8 62.2,64.8 62.4,65 62.4,69.8 44.4,69.8 LCD_SCREEN.3
RX  (via drill 0.3)
  Top 0.203: IC1.12 48.4,40.2 49.6,40.2 v49.6,43.2 49.4,43.4 49.4,48.4 v52,51
  Bottom 0.203: v49.6,43.2 53.2,46.8 SERIALOUT.2 | v52,51 66.2,51 97.6,82.4 DIGITAL.8
SHAFTSPEED_IN
  Bottom 0.203: U$15.P$3 91.4,73.8 95,77.4 97.6,77.4 ANALOGUE_IN.8 97.8,77.4 100,77.4 100,59.6 90,49.6 82.8,49.6 75.8,42.6 45.2,42.6 9,6.4 JP6.1
SHUT_DOWN  (via drill 0.3)
  Top 0.203: v81.2,83.6 80.8,83.6 80.4,84 79.6,84 v79.6,21.2
  Bottom 0.203: v81.2,83.6 81.8,83.6 81.8,85 U$16.15 | v79.6,21.2 64.8,6.4 INVERTER.3
START_UP  (via drill 0.3)
  Top 0.203: v81.8,74.8 80.8,73.8 80.87,37.29 80.95,37.49 | v81.44,34.63 81.28,34.63 80.9,35.15 80.9,37.03
  Top 0.254: 80.9,37.03 80.9,37.26 80.87,37.29
  Bottom 0.203: v81.8,74.8 81.8,79.8 U$16.2 | v81.44,34.63 57.2,10.4 46,10.4 42,6.4 MEASUREMENT.3
TX  (via drill 0.3)
  Top 0.203: IC1.10 58.2,41.4 57.4,42.2 v57.4,45.4 57.4,46.03 59.57,48.2 65.2,48.2 69.4,52.4 69.4,80.8 v76.2,87.6
  Bottom 0.203: v57.4,45.4 56,46.8 SERIALOUT.1 | v76.2,87.6 95.2,87.6 97.6,85.2 DIGITAL.7
USB_D+
  Bottom 0.203: X1.3 97.6,20.2 95,22.8 91.6,22.8 JP4.3
USB_D-
  Bottom 0.203: X1.2 97.6,18.2 96.8,19 92.8,19 91.6,20.2 JP4.2
USB_UART_D+
  Top 0.203: IC1.19 48.4,31 53.4,31 53.4,18 63.2,8.2 93.19,8.2 93.8,7.59 93.8,6.4 JP1.3
USB_UART_D-
  Top 0.203: IC1.18 48.2,32.2 47.2,32.2 47.2,16.6 58.2,5.6 58.2,5 61.4,1.8 92.56,1.8 94.6,3.84 94.6,6.2 JP1.2
V0  (via drill 0.3)
  Top 0.203: v36.6,67.4 34.4,67.4 U$17.2
  Bottom 0.203: v36.6,67.4 39.2,67.4 LCD_SCREEN.4
V_USB
  Bottom 0.203: X1.1 97.6,15.4 84,15.4 JP5.1

## Text on the board
tPlace: Power | GND | Inverter | DC/DC | Controller | Dump Load | Controller | 16 | 15 | Dump Load | DC/DC | Inverter | LCD | Power | 2 | 1 | DC/DC | DLoad_2 | GND | Rx | Tx | DLoad_1 | Rx | Inv_Lb | Inv_Hb | Tx | Inv_La | Inv_Ha | GND | GND | 12V | So | Faul | Trig | GND | DCi | DCv | PWM | GND | ACv | DCv | Sta | GND | GND | DL2 | DL1 | V_ac | I_ac | SD | LB | HB | LA | HA | GND | Control Stick | datalogger
tNames: 12V | LEDs | Clko1 | Buttons | Clk | 5V | 3.3V | D_out | + | Clko2 | B1 | B2 | B3 | B4 | Micro Hydro | GND | PL! | - | D_in | Controller | TX | RX | + | Imperial College | Kingfisher 2012 | Shaftspeed | - | DC/DC1 | DC/DC2 | 12V ref DC- | Ind_V | DCL_V | + | Inv_V | - | Inv_I | + | - | ! High Voltage ! | 12V ref AC- | + | GND | - | D+ | board | D- | ! High Voltage ! | pwr CS | 5V | usb | Tacho
bNames: 57183-A | 57183-A